# Altium PCB smart_table.PcbDoc
Units mm, origin at the board's own origin, x right, y up, seen from the top; angles counter-clockwise.
Board outline 100 x 100 mm, 2 copper layers (Top Layer, Bottom Layer); 60 components, 53 nets, 208 pads, 0 vias.
Unrouted connection lines stored in the file: 127.
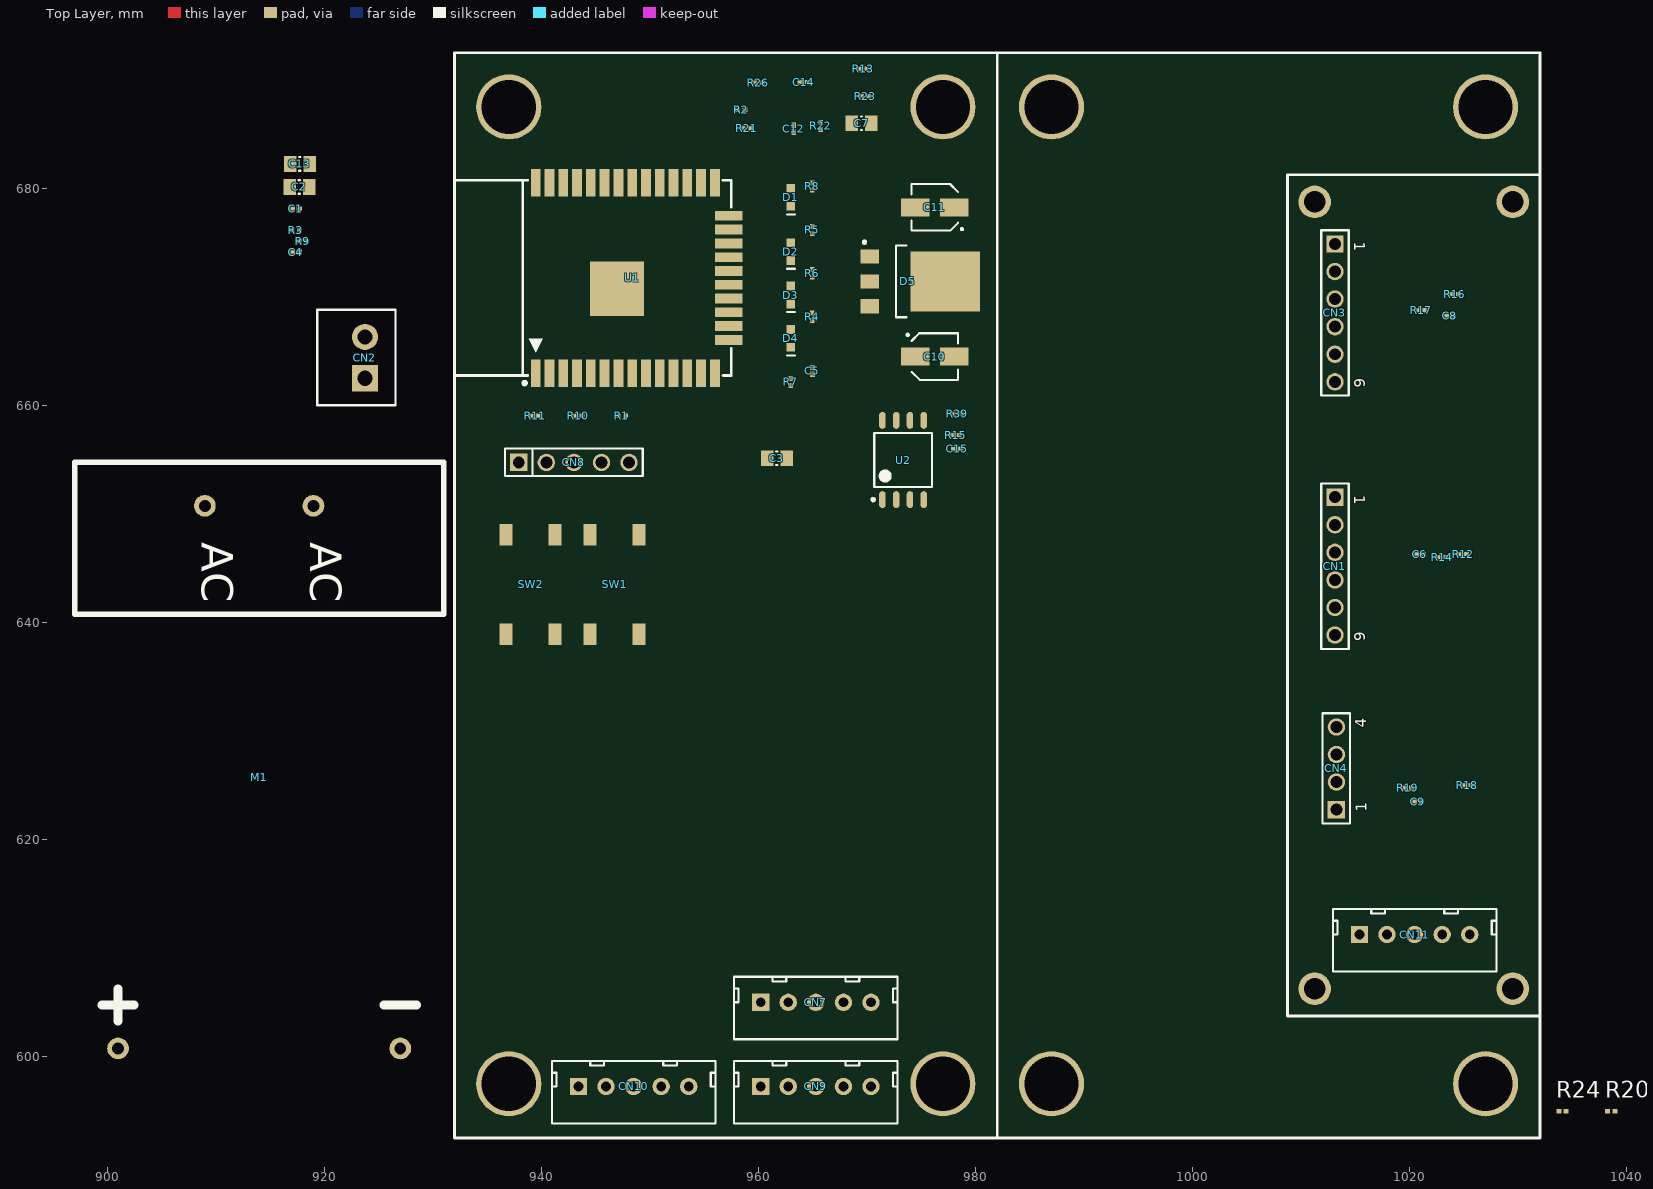
[diagram p0: Top Layer view]
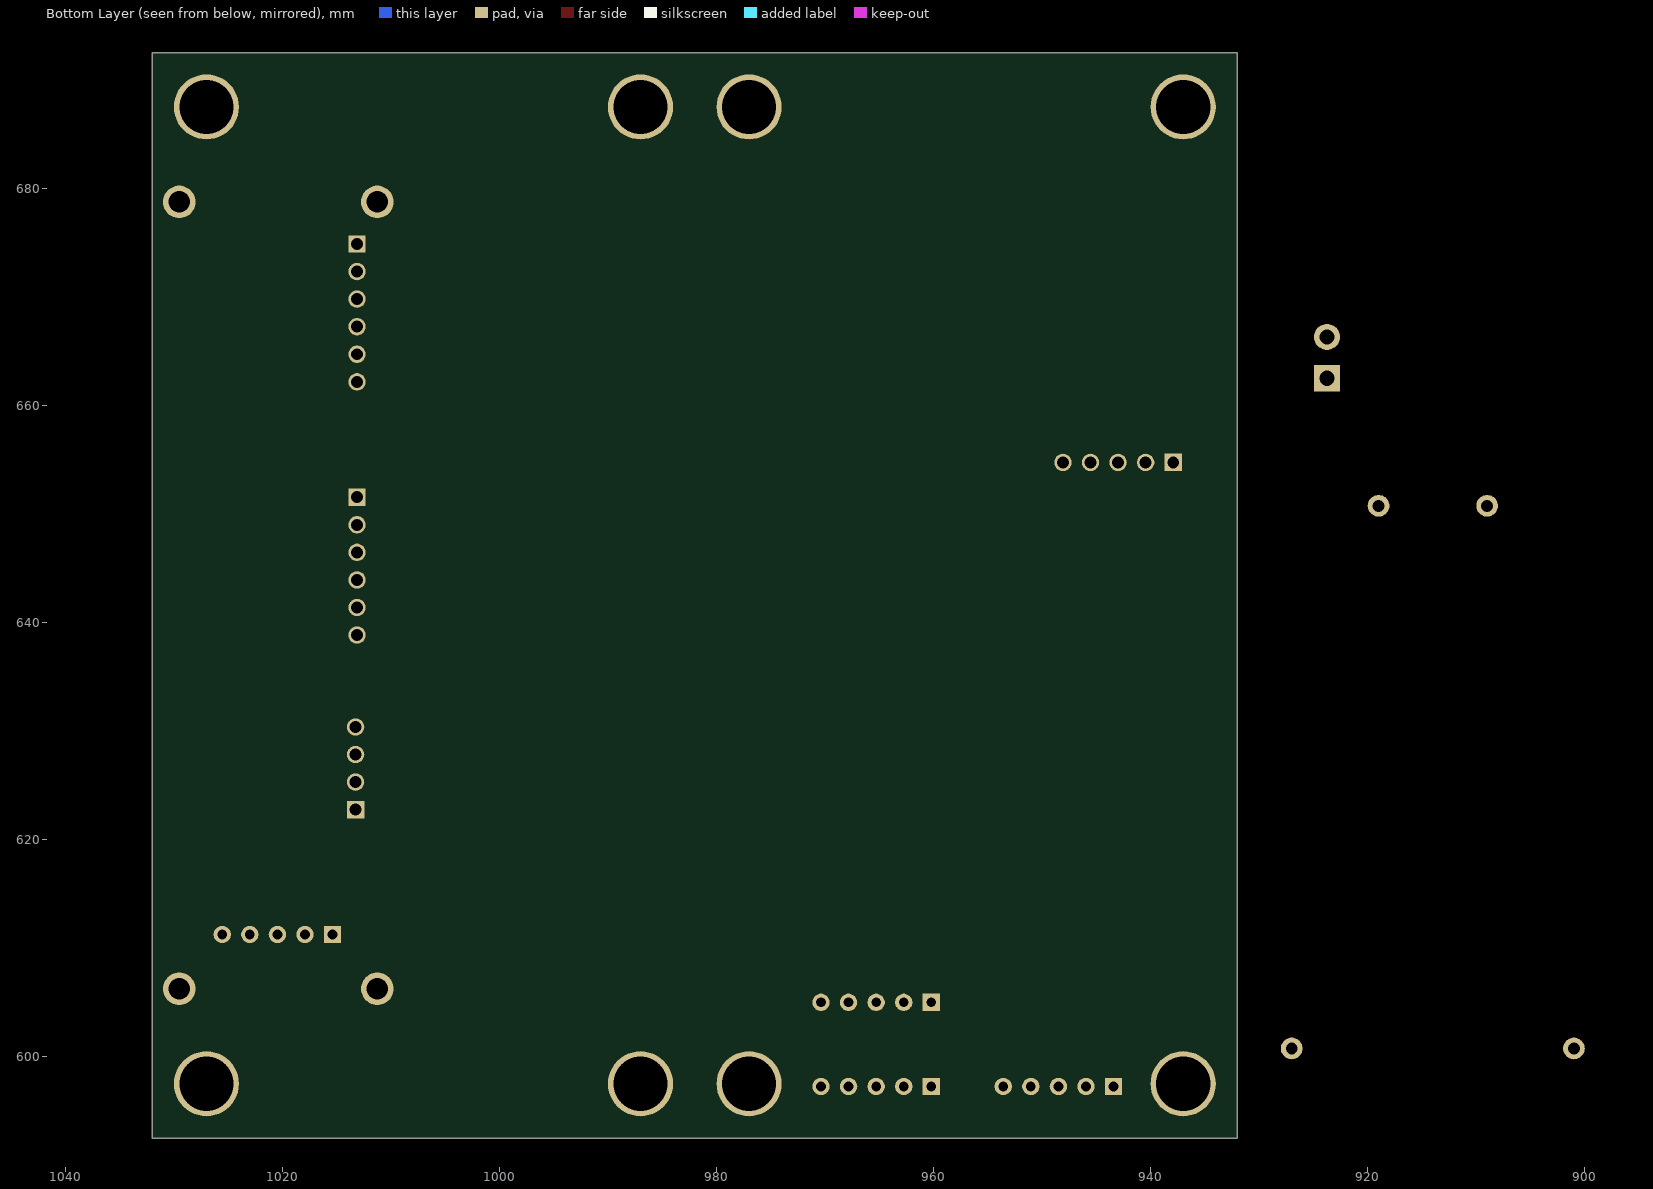
[diagram p1: Bottom Layer view, seen from below]

## Layer stack, top to bottom
Top Solder: solder mask 0.0102, Solder Resist, Dk 3.5
Top Layer: signal copper 0.0356
Dielectric 1: dielectric 0.32, FR-4, Dk 4.8
Bottom Layer: signal copper 0.0356
Bottom Solder: solder mask 0.0102, Solder Resist, Dk 3.5

## Board outline
932,592.5 932,692.5 1032,692.5 1032,592.5

## Design rules (kind name [scope] priority, off if disabled: settings)
Clearance [All] p1: gap=0.1 ignorepadtopadclearanceinfootprint=FALSE
PolygonConnect [All] p1: connectstyle=Relief reliefconductorwidth=0.254 reliefentries=4 polygonreliefangle="90 Angle" airgapwidth=0.254
RoutingVias [All] p1: holewidth=0.711 width=1.27 viastyle="Through Hole" minholewidth=0.711 minwidth=1.27 maxholewidth=0.711 maxwidth=1.27
SolderMaskExpansion [All] p1: expansion=0.102
Width [All] p1: maxlimit=1 minlimit=0.254 preferedwidth=0.5
30 further rules are at their usual default settings.

## Components (designator, comment, footprint, x,y, rotation, side; value= is the part's Value field where it differs from the comment)
C1 "CAP" CAPC0603X31N 917.38,678.125 r180 top
C2 "CAP" CAPC2012X125N 917.7,680.125 r180 top
C3 "CAP" CAPC2012X145N 961.7,655.125 r180 top
C4 "CAP" CAPC0603X31N 917.38,674.125 r180 top
C5 "CAP" CAPC0603X31N 964.97,663.17 r270 top
C6 "CAP" CAPC0603X31N 1020.92,646.28 r180 top
C7 "CAP" CAPC2012X125N 969.5,686 r180 top
C8 "CAP" CAPC0603X31N 1023.68,668.25 r180 top
C9 "CAP" CAPC0603X31N 1020.75,623.5 r180 top
C10 "CAP_POL" CAPAE430X550N 976.25,664.5 r0 top
C11 "CAP_POL" CAPAE430X550N 976.25,678.25 r180 top
C12 "CAP" CAPC0603X31N 963.25,685.5 r270 top
C13 "CAP" CAPC2012X125N 917.75,682.25 r180 top
C14 "CAP" CAPC0603X31N 964.17,689.78 r180 top
C15 "CAP" CAPC0603X31N 978.32,656 r0 top
CN1 "CN_1X6M" CN_WURTH_61300611121 1013.12,645.19 r270 top
CN2 "CN_1X2M" CN_WURTH_691321300002 923.75,662.5 r90 top
CN3 "CN_1X6M" CN_WURTH_61300611121 1013.12,668.52 r270 top
CN4 "CN_1X4M" CN_WURTH_61300411121 1013.25,626.56 r90 top
CN7 "CN_1X5M" CN_JST_B5B-XH-A 965.29,605 r0 top
CN8 "CN_1X5M" CN_Wurth_61300511121 943,654.75 r0 top
CN9 "CN_1X5M" CN_JST_B5B-XH-A 965.29,597.25 r0 top
CN10 "CN_1X5M" CN_JST_B5B-XH-A 948.5,597.25 r0 top
CN11 "CN_1X5M" CN_JST_B5B-XH-A 1020.46,611.25 r0 top
D1 "DIO_LED" DIO_KINGBRIGHT_KP-1608S 962.97,679.17 r270 top
D2 "DIO_LED" DIO_KINGBRIGHT_KP-1608S 962.97,674.17 r270 top
D3 "DIO_LED" DIO_KINGBRIGHT_KP-1608S 962.97,670.17 r270 top
D4 "DIO_LED" DIO_KINGBRIGHT_KP-1608S 962.97,666.17 r270 top
D5 "IC_TI_LM1117" IC_TI_LM1117_TO252 974.97,671.42 r0 top
M1 "MSC_HiLink_HLK-20M05" MSC_HiLink_HLK-20M05 914,625.75 r270 top
R1 "RES" RESC0603X26N 947.42,659.03 r180 top
R2 "RES" RESC0603X26N 958.42,687.25 r180 top
R3 "RES" RESC0603X26N 917.37,676.125 r180 top
R4 "RES" RESC0603X26N 964.97,668.17 r270 top
R5 "RES" RESC0603X26N 964.97,676.17 r270 top
R6 "RES" RESC0603X26N 964.97,672.17 r270 top
R7 "RES" RESC0603X26N 962.97,662.17 r270 top
R8 "RES" RESC0603X26N 964.97,680.17 r270 top
R9 "RES" RESC0603X26N 918.03,675.125 r180 top
R10 "RES" RESC0603X26N 943.42,659.03 r180 top
R11 "RES" RESC0603X26N 939.42,659.03 r180 top
R12 "RES" RESC0603X26N 1024.92,646.28 r180 top
R13 "RES" RESC0603X26N 969.67,691.03 r180 top
R14 "RES" RESC0603X26N 1023,646 r180 top
R15 "RES" RESC0603X26N 978.17,657.25 r0 top
R16 "RES" RESC0603X26N 1024.17,670.25 r180 top
R17 "RES" RESC0603X26N 1021.08,668.75 r180 top
R18 "RES" RESC0603X26N 1025.33,625 r180 top
R19 "RES" RESC0603X26N 1019.83,624.75 r180 top
R20 "RES" RESC0603X26N 1038.578,594.969 r0 top
R21 "RES" RESC0603X26N 958.92,685.53 r180 top
R22 "RES" RESC0603X26N 965.75,685.75 r270 top
R23 "RES" RESC0603X26N 969.83,688.5 r180 top
R24 "RES" RESC0603X26N 1034.078,594.969 r0 top
R26 "RES" RESC0603X26N 960,689.75 r180 top
R39 "RES" RESC0603X26N 978.328,659.219 r0 top
SW1 "Tact_Switch" Tact_Switch_SMD 946.75,643.5 r90 top
SW2 "Tact_Switch" Tact_Switch_SMD 939,643.5 r90 top
U1 "MSC_ESP32-WROOM-32D" MSC_ESP32-WROOM-32D 945,671.75 r90 top
U2 "IC_Winbond_8pin_25" IC_Winbond_8pin_25 973.328,654.969 r90 top

## Footprints (in the part's own frame and the unit in brackets; to place one, negate y for a bottom-side part, rotate by r counter-clockwise, add the part's x,y. Pads: shape width x height; smd on the part's side, far side on the other; paste and mask are expansions set on the pad)
CAPAE430X550N [mm]
  rect 2.65x1.65 smd: 1(-1.8,0) 2(1.8,0)
  silkscreen extent -2.6,-2.15 2.15,2.15, body extent -2.3,-2.15 2.3,2.15, height 5.4
CAPC0603X31N [mm] "Chip Capacitor, 2-Leads, Body 0,60x0,30mm, IPC Medium Density"
  rect 0.5x0.44 smd: 1(-0.32,0) 2(0.32,0)
  body extent -0.3,-0.15 0.3,0.15, height 0.31
CAPC2012X125N [mm]
  rect 1.15x1.45 smd: 1(-0.9,0) 2(0.9,0)
  silkscreen extent -0.05,-0.62 0.05,0.63, body extent -1.1,-0.72 1.1,0.73, height 1.25
CAPC2012X145N [mm]
  rect 1.15x1.45 smd: 1(-0.9,0) 2(0.9,0)
  silkscreen extent -0.05,-0.62 0.05,0.63, body extent -1.1,-0.72 1.1,0.73, height 1.45
CN_JST_B5B-XH-A [mm]
  rect 1.6x1.6 hole 0.9: 1(-5.08,0)
  round 1.6 hole 0.9: 2(-2.54,0) 3(0,0) 4(2.54,0) 5(5.08,0)
  silkscreen extent -7.53,-3.4 7.53,2.35
CN_WURTH_61300411121 [mm]
  rect 1.6x1.6 hole 1.1: 1(-3.81,0)
  round 1.6 hole 1.1: 2(-1.27,0) 3(1.27,0) 4(3.81,0)
  silkscreen extent -5.08,-1.27 5.08,1.27, body extent -5.08,-1.27 5.08,1.27, height 8.54
CN_Wurth_61300511121 [mm] "5 pins, 1 row, straight, gold plating"
  rect 1.6x1.6 hole 1.1: 1(-5.08,0)
  round 1.6 hole 1.1: 2(-2.54,0) 3(0,0) 4(2.54,0) 5(5.08,0)
  silkscreen extent -6.35,-1.27 6.35,1.27, body extent -6.35,-1.27 6.35,1.27, height 8.54
CN_WURTH_61300611121 [mm]
  rect 1.6x1.6 hole 1.1: 1(-6.35,0)
  round 1.6 hole 1.1: 2(-3.81,0) 3(-1.27,0) 4(1.27,0) 5(3.81,0) 6(6.35,0)
  silkscreen extent -7.62,-1.27 7.62,1.27, body extent -7.62,-1.27 7.62,1.27, height 8.54
CN_WURTH_691321300002 [mm]
  rect 2.4x2.4 hole 1.4: 1(0,0)
  round 2.4 hole 1.4: 2(3.81,0)
  silkscreen extent -2.49,-2.8 6.31,4.4, body extent -2.5,-2.8 6.31,4.4, height 9.2
DIO_KINGBRIGHT_KP-1608S [mm] "LED Green"
  rect 0.8x0.8 smd: 1(0.825,0) 2(-0.825,0)
  silkscreen extent 1.58,-0.35 1.58,0.41, body extent -0.8,-0.4 0.8,0.4, height 1.09
IC_TI_LM1117_TO252 [mm]
  rect 1.7x1.3 smd: 1(-4.7,2.29) 2(-4.7,0) 3(-4.7,-2.29)
  rect 6.4x5.55 smd: 4(2.25,0)
  silkscreen extent -5.32,-3.3 -1.35,3.75, body extent -5.21,-3.37 4.89,3.37, height 2.37
IC_Winbond_8pin_25 [mm] "SOIC, 8-Leads, Body 5,28x5,28mm, Pitch 1,27mm, IPC Medium Density"
  oval 1.55x0.6 smd: 1(-3.65,1.905) 2(-3.65,0.635) 3(-3.65,-0.635) 4(-3.65,-1.905) 5(3.65,-1.905) 6(3.65,-0.635) 7(3.65,0.635) 8(3.65,1.905)
  silkscreen extent -3.77,-2.65 2.47,2.88, body extent -4,-2.65 4,2.65, height 2.16
MSC_ESP32-WROOM-32D [mm]
  rect 2.54x0.9 smd: 1(-8.77,5.522) 2(-8.77,4.252) 3(-8.77,2.982) 4(-8.77,1.712) 5(-8.77,0.442) 6(-8.77,-0.828) 7(-8.77,-2.098) 8(-8.77,-3.368) 9(-8.77,-4.638) 10(-8.77,-5.908) 11(-8.77,-7.178) 12(-8.77,-8.448) 13(-8.77,-9.718) 14(-8.77,-10.988) 25(8.75,-10.988) 26(8.75,-9.718) 27(8.75,-8.448) 28(8.75,-7.178) 29(8.75,-5.908) 30(8.75,-4.638) 31(8.75,-3.368) 32(8.75,-2.098) 33(8.75,-0.828) 34(8.75,0.442) 35(8.75,1.712) 36(8.75,2.982) 37(8.75,4.252) 38(8.75,5.522)
  rect 0.9x2.54 smd: 15(-5.715,-12.258) 16(-4.445,-12.258) 17(-3.175,-12.258) 18(-1.905,-12.258) 19(-0.635,-12.258) 20(0.635,-12.258) 21(1.905,-12.258) 22(3.175,-12.258) 23(4.445,-12.258) 24(5.715,-12.258)
  rect 5x5 smd: 39(-1,-1.978)
  silkscreen extent -9.84,-12.49 9,13.01, body extent -9.04,-12.51 9.04,13.03, height 3
MSC_HiLink_HLK-20M05 [mm]
  round 2 hole 1.1: 1(-25,-5) 2(-25,5) 3(25,13) 4(25,-13)
  silkscreen extent -29,-17 22.5,17, body extent -28.75,-16.7 28.75,16.7, height 24
RESC0603X26N [mm]
  rect 0.46x0.42 smd: 1(-0.33,0) 2(0.33,0)
  body extent -0.3,-0.15 0.3,0.15, height 0.23
Tact_Switch_SMD [mm]
  rect 2x1.2 smd: 1(-4.575,2.25) 2(4.575,2.25) 3(-4.575,-2.25) 4(4.575,-2.25)
  body extent -5,-3 5,3, height 9.75

## Part data
C1 C4 C5 C6 C8 C9 C12 C14 C15: library part 01_01477, "CAP, MLCC, X5R, 100NF, 6.3V, 02", Manufacturer=Murata, Manufacturer PN=GRM033R60J104KE19D, Supplier Part Number 1=1775994, Value1=100n, Value2=6V3, AutoId=1477, ComponentLink1Description=Datasheet, ComponentLink1URL=X:\01_dataSheets\CAP_MURATA_GRM033R60J10KE19X.pdf, DeviceType=capacitor, Id=01_01477, MountType=SMD, Status="0 - Unchecked", SubType=Ceramic, Supplier 1=Farnell
C2 C7 C13: library part 01_01396, "X7R 10% 0805", Manufacturer=KEMET, Manufacturer PN=C0805C105K5RACTU, Supplier Part Number 1=2118131, Value1=1u, Value2=50V, AutoId=1396, ComponentLink1Description=Datasheet, ComponentLink1URL=X:\01_Datasheets\CAP_KEMET_CxxxxCxxxXxRAC.pdf, DeviceType=capacitor, Id=01_01396, MountType=SMT, Status="2 - Checked and Approved", SubType=Ceramic, Supplier 1=Farnell
C3: library part 01_01524, "Multilayer Ceramic Capacitors MLCC - SMD/SMT 10uF 16Volts X7R +/-20% 0805 STD", Manufacturer=Kemet, Manufacturer PN=EMK212BB7106MG-T, Supplier Part Number 1=963-EMK212BB7106MG-T, Value1=10u, Value2=16V, AutoId=1524, ComponentLink1Description=Datasheet, ComponentLink1URL=X:\01_Datasheets\, DeviceType=capacitor, Id=01_01524, MountType=SMT, Status="0 - Unchecked", SubType="Ceramic Capacitors", Supplier 1=Mouser
C10 C11: library part 01_01399, "ELCO 20%", Manufacturer=Nichicon, Manufacturer PN=UWF1C100MCL1GB, Supplier Part Number 1=647-UWF1C100MCL1GB, Value1=10u, Value2=16V, AutoId=1399, ComponentLink1Description=Datasheet, ComponentLink1URL=X:\01_Datasheets\CAP_NICHICON_UWF1C100MCL1GB.pdf, DeviceType=capacitor, Id=01_01399, MountType=SMT, Status="2 - Checked and Approved", SubType=Electrolyte, Supplier 1=Farnell
CN1 CN3: library part 02_00118, "WURTH ELEKTRONIK - 61300611121 - HEADER, 2.54MM, PIN, THT, VERTICAL, 6WAY", Manufacturer=Wurth, Manufacturer PN=61300611121, Supplier Part Number 1=2356158, Value2="6 pin male header", AutoId=118, ComponentLink1Description=Datasheet, ComponentLink1URL=X:\01_Datasheets\CN_WURTH_61300611121.pdf, ComponentLink2Description=ComponentVerificationSheet, ComponentLink2URL=X:\02_ComponentVerificationSheets\, DeviceType=Connector_6, Id=02_00118, MountType=THT, Status="2 - Checked and Approved", SubType=Header, Supplier 1=Farnell, Value1=61300611121
CN2: library part 02_00094, "WURTH ELEKTRONIK - 691321300002 - HEADER, 3.81MM", Manufacturer=Wurth, Manufacturer PN=691321300002, Supplier Part Number 1=1642006, Value2="2 pin", AutoId=94, ComponentLink1Description=Datasheet, ComponentLink1URL=X:\01_dataSheets\CN_WURTH_691320000x.pdf, ComponentLink2Description=ComponentVerificationSheet, ComponentLink2URL=X:\02_ComponentVerificationSheets\, DeviceType=Connector_2, Id=02_00094, MountType=THT, Status="0 - Unchecked", Supplier 1=Farnell, Value1=691321300002
CN4: library part 02_00034, "4 pin male pin header, pitch 2.54mm", Manufacturer="Wurth Electronics", Manufacturer PN=61300411121, Value3="4 pin", AutoId=36, ComponentLink1Description=Datasheet, ComponentLink1URL=X:\01_Datasheets\CN_WURTH_6130xx11121.pdf, ComponentLink2Description=ComponentVerificationSheet, ComponentLink2URL=X:\02_ComponentVerificationSheets\CN_WURTH_61300411121_ComponentVerificationSheet.xlsx, DeviceType=Connector_4, Id=02_00034, MountType=THT, Status="2 - Checked and Approved", SubType=1x4, Supplier 1=Wurth, Supplier Part Number 1=61300411121, Value1=61300411121
CN7 CN9 CN10 CN11: library part 02_10126, "Through Hole Straight", Manufacturer=JST, Manufacturer PN="B5B-XH-A (LF)(SN)", Supplier Part Number 1=1516281, Value2="5 pin", Value3=2.54mm, AutoId=166, ComponentLink1Description=Datasheet, ComponentLink1URL=X:\01_Datasheets\CN_JST_B5B-XH-A.pdf, ComponentLink2Description=ComponentVerificationSheet, ComponentLink2URL=X:\02_ComponentVerificationSheets\, DeviceType=Connector_, Id=02_10126, MountType=THT, Status="0 - Unchecked", Supplier 1=Farnell, Value1="B5B-XH-A (LF)(SN)"
CN8: library part 02_00139, "Headers & Wire Housings WR-PHD 2.54mm Hdr 5P Single Str Gold", Manufacturer=Wurth, Manufacturer PN=61300511121, Supplier Part Number 1=710-61300511121, Value2="5 pin", Value3=header, AutoId=139, ComponentLink1Description=Datasheet, ComponentLink1URL=X:\01_Datasheets\CN_Wurth_61300511121.pdf, ComponentLink2Description=ComponentVerificationSheet, ComponentLink2URL=X:\02_ComponentVerificationSheets\, DeviceType=Connector_, Id=02_00139, MountType=THT, Status="0 - Unchecked", Supplier 1=Mouser, Value1=61300511121
D1: library part 03_00011, "Led orange", Manufacturer=KINGBRIGHT, Manufacturer PN=KP-1608SECK, Supplier Part Number 1=8529850, Value1=ORANGE, AutoId=11, ComponentLink1Description=Datasheet, ComponentLink1URL=X:\01_Datasheets\DIO_KINGBRIGHT_KP-1608SECK.pdf, ComponentLink2Description=ComponentVerificationSheet, ComponentLink2URL=X:\02_ComponentVerificationSheets\DIO_KINGBRIGHT_KP-1608SECK_ComponentVerificationSheet.xlsx, DeviceType=diode, Id=03_00011, MountType=SMT, Status="2 - Checked and Approved", SubType=LED, Supplier 1=Farnell
D2: library part 03_00010, "Led yellow", Manufacturer=KINGBRIGHT, Manufacturer PN=KP-1608SYC, Supplier Part Number 1=8529841, Value1=YELLOW, AutoId=10, ComponentLink1Description=Datasheet, ComponentLink1URL=X:\01_Datasheets\DIO_KINGBRIGHT_KP-1608SYC.pdf, ComponentLink2Description=ComponentVerificationSheet, ComponentLink2URL=X:\02_ComponentVerificationSheets\DIO_KINGBRIGHT_KP-1608SYC_ComponentVerificationSheet.xlsx, DeviceType=diode, Id=03_00010, MountType=SMT, Status="2 - Checked and Approved", SubType=LED, Supplier 1=Farnell
D3: library part 03_00009, "Led red", Manufacturer=KINGBRIGHT, Manufacturer PN=KP-1608SURC, Supplier Part Number 1=8529868, Value1=RED, AutoId=9, ComponentLink1Description=Datasheet, ComponentLink1URL=X:\01_Datasheets\DIO_KINGBRIGHT_KP-1608SURC.pdf, ComponentLink2Description=ComponentVerificationSheet, ComponentLink2URL=X:\02_ComponentVerificationSheets\DIO_KINGBRIGHT_KP-1608SURC_ComponentVerificationSheet.xlsx, DeviceType=diode, Id=03_00009, MountType=SMT, Status="2 - Checked and Approved", SubType=LED, Supplier 1=Farnell
D4: library part 03_00004, "Led green", Manufacturer=KINGBRIGHT, Manufacturer PN=KP-1608SGC, Supplier Part Number 1=8529833, Value1=GREEN, AutoId=4, ComponentLink1Description=Datasheet, ComponentLink1URL=X:\01_Datasheets\DIO_KINGBRIGHT_KP-1608SGC.pdf, ComponentLink2Description=ComponentVerificationSheet, ComponentLink2URL=X:\02_ComponentVerificationSheets\DIO_KINGBRIGHT_KP-1608SGC_ComponentVerificationSheet.xlsx, DeviceType=diode, Id=03_00004, MountType=SMD, Status="2 - Checked and Approved", SubType=LED, Supplier 1=Farnell
D5: library part 07_10180, "LDO Voltage Regulators 800MA LDO LINEAR REG", Manufacturer=TI, Manufacturer PN=LM1117DT-3.3/NOPB, Value1=LM1117DT-3.3, Value2="3V3 800mA", AutoId=289, ComponentLink1Description=Datasheet, ComponentLink1URL=X:\01_Datasheets\, ComponentLink2Description=ComponentVerificationSheet, ComponentLink2URL=X:\02_ComponentVerificationSheets\, DeviceType=IC, Id=07_10180, MountType=SMT, Status="0 - Unchecked"
M1: library part 12_00136, "Power Supply", Manufacturer=HiLink, Manufacturer PN=HLK-20M05, Value2="5V 4A", Value3=20W, AutoId=147, ComponentLink1Description=Datasheet, ComponentLink1URL=X:\01_Datasheets\, ComponentLink2Description=ComponentVerificationSheet, ComponentLink2URL=X:\02_ComponentVerificationSheets\, DeviceType=misc, Id=12_00136, MountType=THD, Status="0 - Unchecked", Value1=HLK-20M05
R1 R2 R20 R24 R39: library part 15_00122, "RESISTOR, 0201, 10K, 1%, SMD", Manufacturer=Yageo, Manufacturer PN=RC0201FR-0710K, Value1=10K, Value2=0W05, AutoId=122, ComponentLink1Description=Datasheet, ComponentLink1URL=X:\01_Datasheets\RES_YAGEO_RC0201FR.pdf, DeviceType=resistor, Id=15_00122, MountType=SMT, Status="0 - Unchecked", SubType="Metal film", Supplier 1=Farnell
R3 R4: library part 15_00102, "RESISTOR, 0201, 220R, 1%, SMD", Manufacturer=Yageo, Manufacturer PN=RC0201FR-07220R, Value1=220R, Value2=0W05, AutoId=102, ComponentLink1Description=Datasheet, ComponentLink1URL=X:\01_Datasheets\RES_YAGEO_RC0201FR.pdf, DeviceType=resistor, Id=15_00102, MountType=SMT, Status="0 - Unchecked", SubType="Metal film", Supplier 1=Farnell
R5 R6: library part 15_00114, "RESISTOR, 0201, 2K2, 1%, SMD", Manufacturer=Yageo, Manufacturer PN=RC0201FR-072K2, Value1=2K2, Value2=0W05, AutoId=114, ComponentLink1Description=Datasheet, ComponentLink1URL=X:\01_Datasheets\RES_YAGEO_RC0201FR.pdf, DeviceType=resistor, Id=15_00114, MountType=SMT, Status="0 - Unchecked", SubType="Metal film", Supplier 1=Farnell
R7 R8 R9 R10: library part 15_00104, "RESISTOR, 0201, 330R, 1%, SMD", Manufacturer=Yageo, Manufacturer PN=RC0201FR-07330R, Value1=330R, Value2=0W05, AutoId=104, ComponentLink1Description=Datasheet, ComponentLink1URL=X:\01_Datasheets\RES_YAGEO_RC0201FR.pdf, DeviceType=resistor, Id=15_00104, MountType=SMT, Status="0 - Unchecked", SubType="Metal film", Supplier 1=Farnell
R11 R13 R15 R21: library part 15_00608, "Thick Film Resistors - SMD ZERO OHM JUMPER", Manufacturer=Yageo, Manufacturer PN=RC0201JR-070RL, Supplier Part Number 1=603-RC0201JR-070RL, Value1=0E, Value2=n/a, AutoId=608, ComponentLink1Description=Datasheet, ComponentLink1URL=X:\01_Datasheets\RES_Yageo_RC0201JR-070RL.pdf, DeviceType=resistor, Footprint4=n/a, Id=15_00608, MountType=SMT, Status="0 - Unchecked", Supplier 1=Mouser
R12 R14 R16 R17 R18 R19 R22 R23 R26: library part 15_00098, "RESISTOR, 0201, 100R, 1%, SMD", Manufacturer=Yageo, Manufacturer PN=RC0201FR-07100R, Value1=100R, Value2=0W05, AutoId=98, ComponentLink1Description=Datasheet, ComponentLink1URL=X:\01_Datasheets\RES_YAGEO_RC0201FR.pdf, DeviceType=resistor, Id=15_00098, MountType=SMT, Status="0 - Unchecked", SubType="Metal film", Supplier 1=Farnell
SW1 SW2: library part 12_00117, Value1="tact switch", AutoId=117, ComponentLink1Description=Datasheet, ComponentLink1URL=X:\01_Datasheets\, ComponentLink2Description=ComponentVerificationSheet, ComponentLink2URL=X:\02_ComponentVerificationSheets\, DeviceType=misc, Id=12_00117, Status="0 - Unchecked"
U1: library part 12_10065, "Bluetooth, WiFi 802.11b/g/n, Bluetooth v4.2 + EDR, Class 1, 2 and 3 Transceiver Module 2.4GHz ~ 2.5GHz Integrated, Trace Surface Mount", Manufacturer=Espressif, Manufacturer PN=ESP32, Value2=WROOM, AutoId=143, ComponentLink1Description=Datasheet, ComponentLink1URL=X:\01_Datasheets\, ComponentLink2Description=ComponentVerificationSheet, ComponentLink2URL=X:\02_ComponentVerificationSheets\, DeviceType=misc, Id=12_10065, MountType=SMT, Status="0 - Unchecked", Value1=ESP32
U2: library part 07_00283, "IC FLASH 128M SPI 104MHZ 8SOIC", Manufacturer="Winbond Electronics", Manufacturer PN=W25Q128FVSIG, Supplier Part Number 1=W25Q128FVSIG-ND, Value1=W25Q128FVSG, Value2="Flash 128M", Value3="128M 104MHz", AutoId=290, ComponentLink1Description=Datasheet, ComponentLink1URL=X:\01_Datasheets\IC_Winbond_W25Q128FV.pdf, ComponentLink2Description=ComponentVerificationSheet, ComponentLink2URL=X:\02_ComponentVerificationSheets\, DeviceType=Flash, Id=07_00283, MountType=SMT, Status="0 - Unchecked", SubType=NOR, Supplier 1=Digi-Key

## Free pads (board coordinates)
  round 6 hole 5: ""(937,597.5) ""(937,687.5) ""(977,597.5) ""(977,687.5) ""(987,597.5) ""(987,687.5) ""(1027,597.5) ""(1027,687.5)
  round 3 hole 2: ""(1011.25,678.75) ""(1011.25,606.25) ""(1029.5,678.75) ""(1029.5,606.25)

## Nets (pads, with @x,y where several pads share a name; then routed paths per layer and width w, separated by ;. In a path a pad name is that pad's centre, name@x,y a point inside that pad or via, vN(x,y) a via of type N, cw(c..) or ccw(c..) an arc to the next point about the centre after c; other vN are vias at no path point)
3V3: C11.1 C14.2 CN7.1 CN8.2 CN9.2 CN10.2 D5.2 D5.4 R11.1 R15.1 R21.1
3V3_DAC: C12.2 C13.2 R20.2 R21.2
3V3_ESP: C1.2 C2.2 C3.2 R1.2 R2.2 R5.2 R6.2 R11.2 U1.2
3V3_Flash: C15.2 R15.2 R39.2 U2.8
5V: C10.1 CN8.1 CN9.1 CN10.1 D5.3 R13.1
5VIN: C7.2 M1.3 R13.2
BOOT: C4.2 R1.1 SW1.3 SW1.4 U1.25
DAC_BCK: U1.12
DAC_DIN: U1.10
DAC_FMT: R24.2 U1.9
DAC_LCK: U1.11
DAC_XMT: R20.1 U1.8
Dopler: U1.24
EN: C5.2 R2.1 SW2.3 SW2.4 U1.3
Flash_CLK: U1.28 U2.6
Flash_CS: R39.1 U1.27 U2.1
Flash_SD0: U1.21 U2.5
Flash_SD1: U1.22 U2.2
Flash_SD2: U1.17 U2.3
Flash_SD3: U1.18 U2.7
GND: C1.1 C2.1 C3.1 C4.1 C5.1 C7.1 C10.2 C11.2 C12.1 C13.1 C14.1 C15.1 CN7.4 CN7.5 CN8.5 CN10.5 D1.1 D2.1 D3.1 D4.1 D5.1 M1.4 R3.1 R4.1 R24.1 U1.1 U1.15 U1.38 U1.39 U2.4
LED1: R7.2 U1.14
LED2: R8.2 U1.16
LED3: R10.2 U1.13
LED4: R9.2 U1.23
M_3V3: C6.2 C8.2 C9.1 CN1.1 CN3.1 CN4.2 CN11.2
M_5V: CN11.1
M_GND: C6.1 C8.1 C9.2 CN1.2 CN3.2 CN4.1 CN9.4 CN9.5 CN11.5
M_SCL: CN11.4 R12.2 R16.2 R18.2
M_SDA: CN11.3 R14.2 R17.2 R19.2
NetCN1_3: CN1.3 R12.1
NetCN1_4: CN1.4 R14.1
NetCN2_1: CN2.1 M1.1
NetCN2_2: CN2.2 M1.2
NetCN3_3: CN3.3 R16.1
NetCN3_4: CN3.4 R17.1
NetCN4_3: CN4.3 R18.1
NetCN4_4: CN4.4 R19.1
NetCN7_2: CN7.2 R22.1
NetCN7_3: CN7.3 R23.1
NetCN9_3: CN9.3 R26.1
NetD1_2: D1.2 R7.1
NetD2_2: D2.2 R8.1
NetD3_2: D3.2 R9.1
NetD4_2: D4.2 R10.1
NetR3_2: R3.2 SW1.1 SW1.2
NetR4_2: R4.2 SW2.1 SW2.2
Scale_DT: R23.2 U1.26
Scale_SCK: R22.2 U1.29
SCL: CN10.4 R6.1 U1.36
SDA: CN10.3 R5.1 U1.33
UART_Rx: U1.34
UART_Tx: CN8.4 U1.35
pads on no net: CN1.5 CN1.6 CN3.5 CN3.6 CN8.3 R26.2 U1.4 U1.5 U1.6 U1.7 U1.19 U1.20 U1.30 U1.31 U1.32 U1.37

## Silkscreen, mask and mechanical layers (free items; w line width, h text height)
Top Overlay:
  lines w0.254: 982,592.5 982,692.5 ; 1032,603.75 1008.75,603.75 1008.75,681.25 1032,681.25 ; 932,592.5 1032,592.5 1032,692.5 932,692.5 932,592.5

## Text inside footprints (layer, text, board x,y; h text height)
CN1: Top Overlay "1" at 1014.92,651.74 h1 r270; Top Overlay "6" at 1014.92,639.15 h1 r270
CN3: Top Overlay "1" at 1014.92,675.07 h1 r270; Top Overlay "6" at 1014.92,662.48 h1 r270
CN4: Top Overlay "4" at 1016.025,630.3 h1 r90; Top Overlay "1" at 1016.05,622.545 h1 r90
M1: Top Overlay "AC" at 907.725,647.389 h5 r270; Top Overlay "AC" at 917.725,647.389 h5 r270
U1: Mechanical 13 "CUTOUT POLYGON" at 937.3,668.334 h0.5 r90; Mechanical 13 "ANTENNA" at 935.337,666.025 h1.88 r90